# Altium PCB PMSM_G474V1.0.PcbDoc (part 2 of 2)
Units mil, origin at the board's own origin, x right, y up, seen from the top; angles counter-clockwise.
Board outline 1968.5 x 3149.61 mil, 4 copper layers (Top Layer, VCC, GND, Bottom Layer), stack 23.756 mil thick; 166 components, 95 nets, 523 pads, 254 vias.
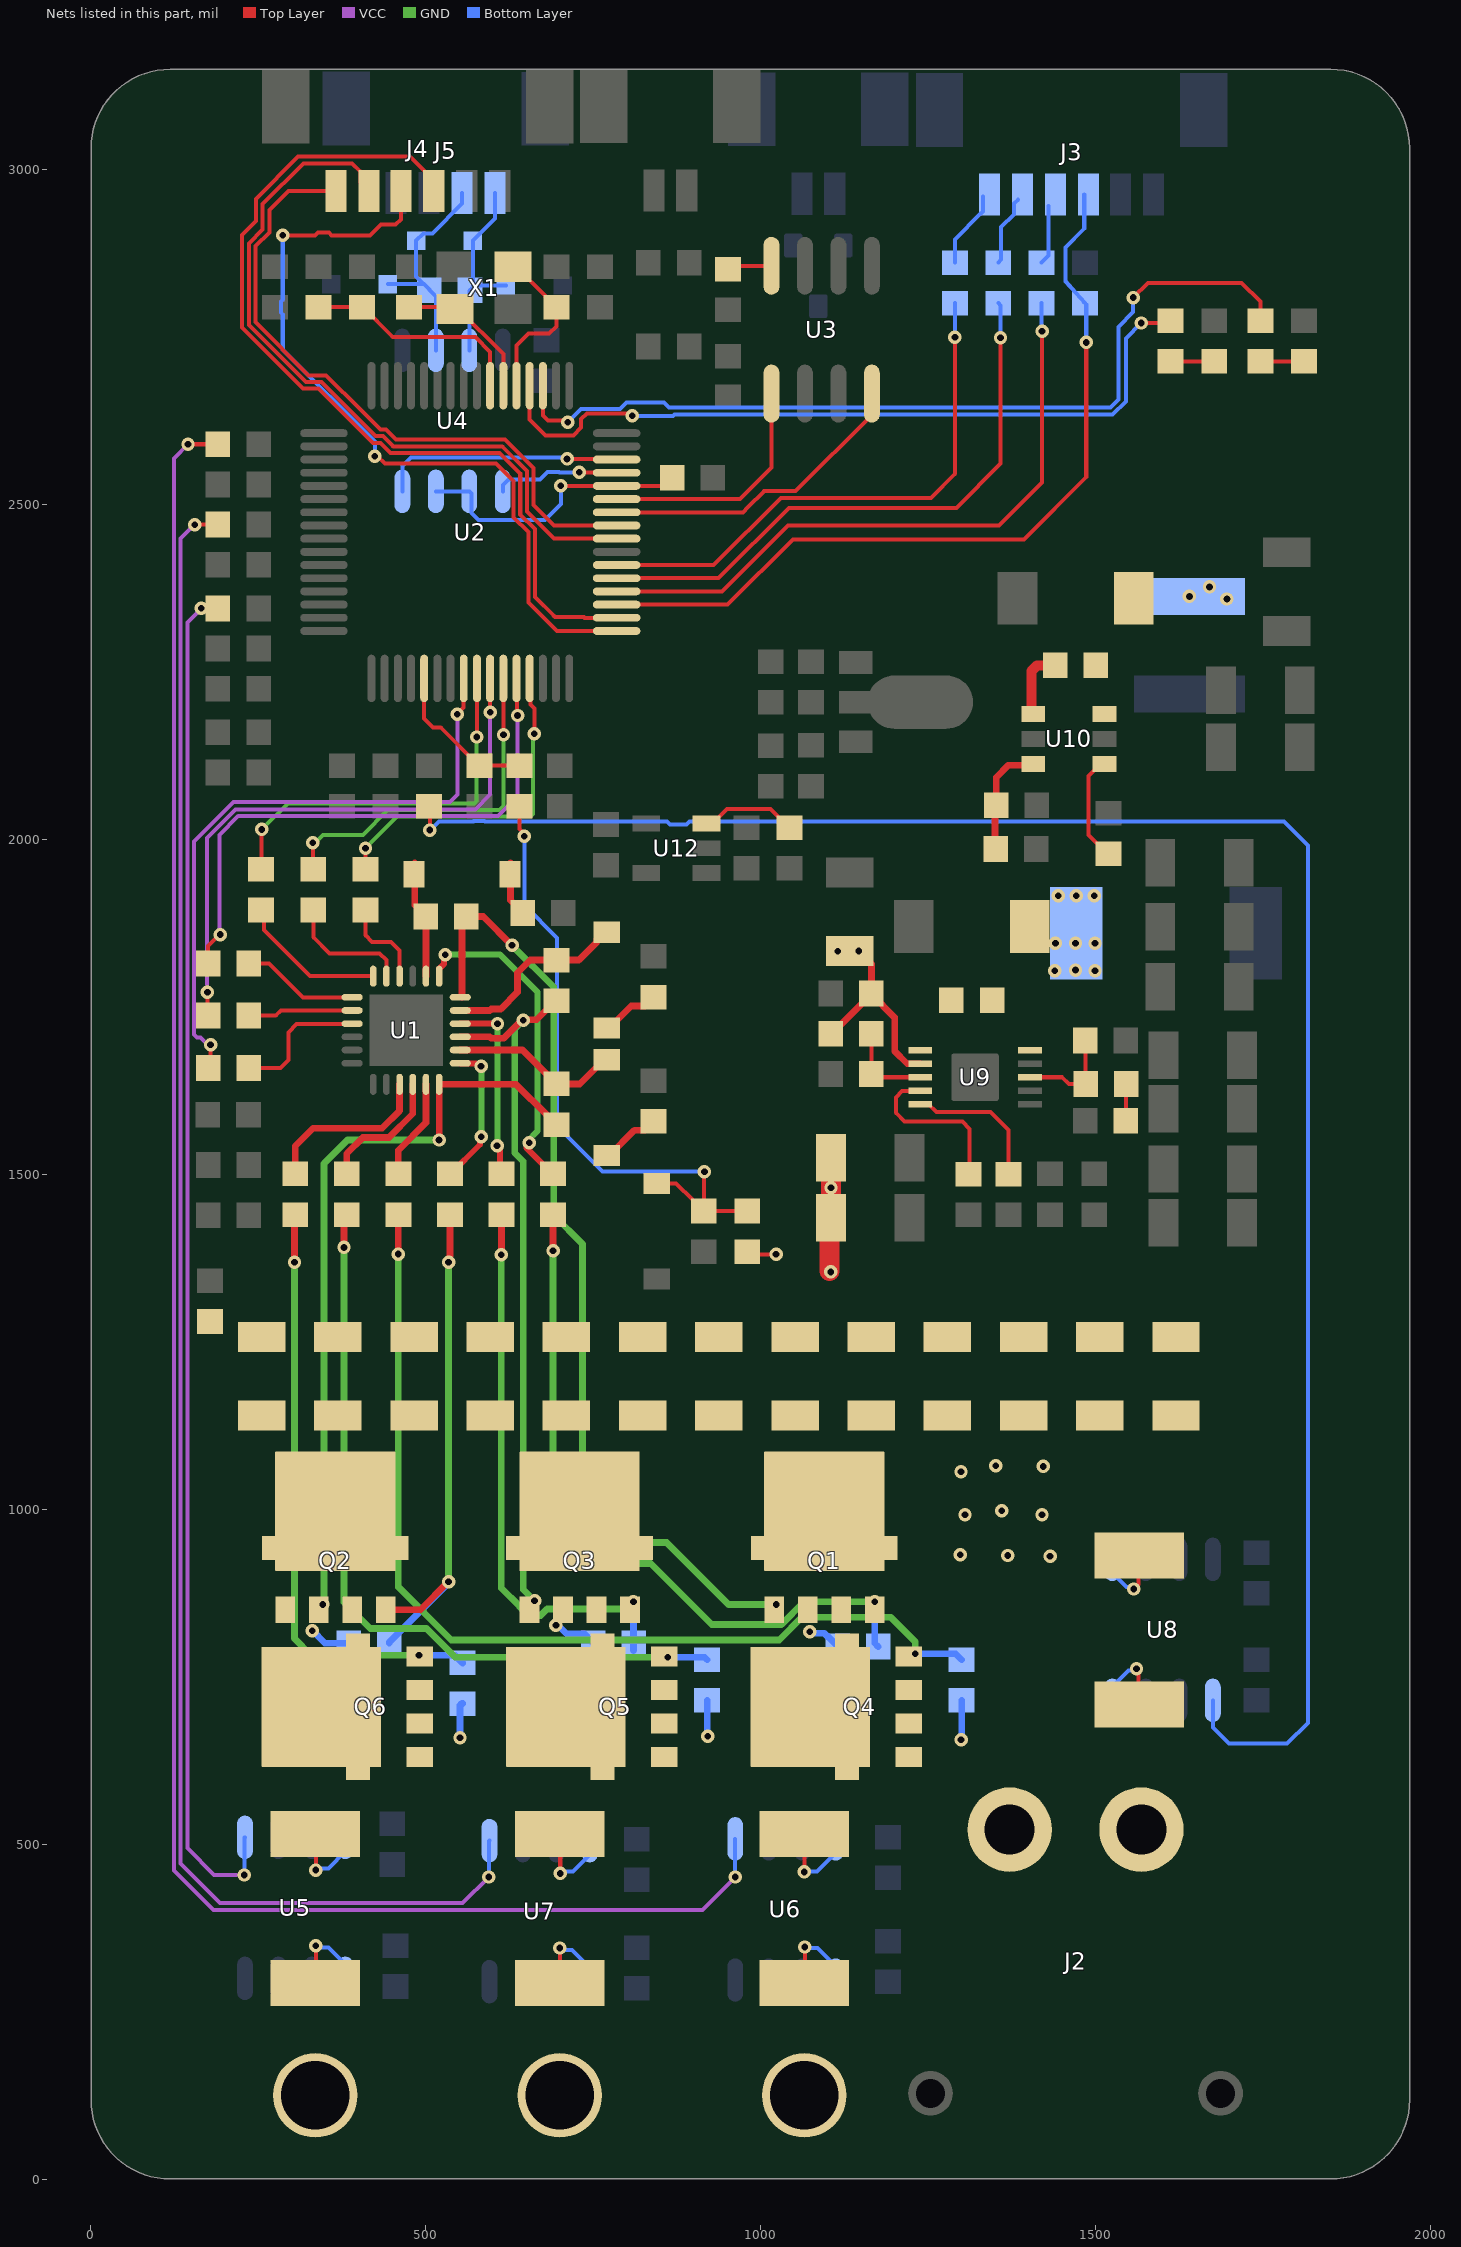
[diagram p4: the nets of this part, all layers, seen from the top]

## Via types
v1: diameter 20, hole 10, Top Layer to Bottom Layer, 237 vias
v2: diameter 40, hole 20, Top Layer to Bottom Layer, 17 vias

## Nets (pads, with @x,y where several pads share a name; then routed paths per layer and width w, separated by ;. In a path a pad name is that pad's centre, name@x,y a point inside that pad or via, vN(x,y) a via of type N, cw(c..) or ccw(c..) an arc to the next point about the centre after c; other vN are vias at no path point) (continued)
LED_0: D1.2 U2.3 | length 1328.4
  Top Layer w6: U2.3@674.76,2677.4 674.76,2633.24 682.32,2625.68 709.32,2625.68 v1(712,2623) ; v1(1556,2809) 1578,2831 1718,2831 1746,2803 D1.2@1746,2774.31
  Bottom Layer w6: v1(712,2623) 731.49,2642.49 789.73,2642.49 799.73,2652.49 855.76,2652.49 863.25,2645 1521.86,2645 1534,2657.14 1534,2765.28 1556,2787.28 v1(1556,2809)
LED_1: D3.2 U2.4 | length 1153.7
  Top Layer w6: U2.4@655.08,2677.4 655.08,2626.92 679,2603 720.28,2603 732,2614.72 732,2627.5 740.5,2636 804.51,2636 v1(808.02,2632.49) ; v1(1568,2771) 1608.69,2771 D3.2@1612,2774.31
  Bottom Layer w6: v1(808.02,2632.49) 868.98,2632.49 870.99,2634.5 1525.5,2634.5 1545,2654 1545,2748 v1(1568,2771)
MCU_CAN_N: U2.58 U3.4 | length 472.8
  Top Layer w6: U2.58@785,2488.43 973.43,2488.43 981.11,2496.11 1004.55,2519.55 1005.05,2520.05 1052.02,2520.05 1166,2634.03 U3.4@1166,2665.53
MCU_CAN_P: U2.59 U3.1 | length 361
  Top Layer w6: U2.59@785,2508.11 969.11,2508.11 992.55,2531.55 1016,2555 U3.1@1016,2665.53
MU_OUT: C11.2 Q1.1 Q4.5 R9.2 R25.1 U1.18 U6.8 | length 1620.7
  Top Layer w6: R25.1@1065,515 1065.16,514.84 v1(1065.16,458.59)
  Top Layer w10: U1.18@553.92,1764.37 554,1764.45 554,1878.68 C11.2@560.32,1885 585.74,1885 v1(628.79,1841.94)
  GND w10: v1(628.79,1841.94) 691,1779.74 691,1439 734,1396 734,1016 799.5,950.5 859.5,950.5 952,858 v1(1023,858)
  Bottom Layer w6: v1(1065.16,458.59) 1066.02,459.45 1084.16,459.45 1111.93,487.22 U6.8@1111.93,507.89
  Bottom Layer w10: v1(1073,817) 1074.91,815.09 1094.6,815.09 1100.39,809.29 1101.38,809.29 1114.68,795.98 R9.2@1114.68,795
MV_OUT: C12.2 Q3.1 Q5.5 R10.2 R24.1 U1.15 U7.8 | length 1254.5
  Top Layer w6: R24.1@700,515 700.73,514.27 v1(700.73,456.41)
  Top Layer w10: U1.15@551.42,1705.31 595.57,1705.31 597.89,1703 616.11,1703 643.11,1730 v1(645.5,1730) ; v1@646.25,1729.25 648,1731 665.65,1731 694.02,1759.37 C12.2@695,1759.37
  GND w10: v1(645.5,1730) 632.64,1717.14 632.64,1557.64 632.64,1553.74 632.64,1532.25 645.5,1519.39 645.5,880.27 v1(662.4,863.37)
  Bottom Layer w6: v1(700.73,456.41) 703.41,459.09 719.44,459.09 745,484.65 U7.8@745,505.32
  Bottom Layer w10: v1(694.24,827) 696.95,827 709.66,814.29 736.38,814.29 749.68,800.98 R10.2@749.68,800
MW_OUT: C13.2 Q2.1 Q6.5 R11.2 R23.1 U1.12 U5.8 | length 1321.4
  Top Layer w6: R23.1@335,515 335.73,514.27 v1(335.73,461.41)
  Top Layer w10: v1(519.82,1551.24) 519.92,1551.35 U1.12@519.92,1634.45 634.92,1634.45 680.71,1588.66 680.71,1587.68 694.02,1574.37 C13.2@695,1574.37
  GND w10: v1(346,858) 348,860 348,1516 383.24,1551.24 v1(519.82,1551.24)
  Bottom Layer w6: v1(335.73,461.41) 338.41,464.09 354.44,464.09 380,489.65 U5.8@380,510.32
  Bottom Layer w10: v1(330.64,818.83) 349.48,800 R11.2@384.68,800
NetC11_1: C11.1 D8.2 U1.20 | length 176.1
  Top Layer w10: D8.2@483.5,1965 483.5,1902.17 500.24,1885.43 U1.20@500.24,1795.87
NetC12_1: C12.1 D9.2 U1.17 | length 286.3
  Top Layer w10: U1.17@551.42,1744.69 595.57,1744.69 597.89,1747 612,1747 637,1772 637,1801 656,1820 C12.1@695,1820 728.5,1820 755.32,1846.81 755.32,1850.75 766.07,1861.5 D9.2@770,1861.5
NetC13_1: C13.1 D10.2 U1.14 | length 255.1
  Top Layer w10: U1.14@551.42,1685.63 644.37,1685.63 680.71,1649.29 680.71,1648.31 694.02,1635 C13.1@695,1635 729.88,1635 766.07,1671.19 D10.2@770,1671.19
NetC27_1: C27.1 U9.1
NetC27_2: C27.2 D11.2 L1.1 U9.10
  other v1: 1439,1804 1499,1804 1470,1805 1440,1845 1470,1845 1499,1845 1444,1916 1471,1916 1498,1916
NetC28_1: C28.1 U9.4 | length 251.5
  Top Layer w6: U9.4@1238,1624.84 1237.44,1624.28 1211.28,1624.28 1202,1615 1202,1592 1215,1579 1301,1579 1312,1568 1312,1502.32 C28.1@1310,1500.32
NetC37_1: C37.1 R43.2 U9.8 | length 152.3
  Top Layer w6: U9.8@1402,1645 1450,1645 1460,1635 R43.2@1485,1635 1484.69,1635.31 C37.1@1484.69,1700
NetC38_1: C38.1 R43.1 | length 55.1
  Top Layer w6: C38.1@1545.32,1580 1545.32,1634.69 R43.1@1545.63,1635
NetC39_1: C39.1 U10.1 | length 104.3
  Top Layer w15: U10.1@1406.85,2187.4 1404,2190.25 1404,2251.21 1412.79,2260 C39.1@1439.69,2260
NetC39_2: C39.2 D12.2 L2.1 U10.6
  other v1: 1696,2359 1640,2362.84 1670,2377
NetC50_1: C50.1 R48.2 U2.7 | length 334.3
  Top Layer w6: C50.1@339.96,2794.69 R48.2@405,2794.68 405.98,2794.68 450.67,2750 574,2750 596.02,2727.98 U2.7@596.02,2677.4
NetD1_1: D1.1 R26.1 | length 65
  Top Layer w6: D1.1@1746,2713.68 R26.1@1811,2713.68
NetD2_2: D2.2 R15.1 R16.2 R21.1 | length 960.7
  Top Layer w6: R21.1@640,2049.69 640,2015.79 647,2008.79 v1(647,2005) ; D2.2@845,1486.5 873.69,1486.5 898.71,1461.48 898.71,1460.62 914.02,1445.32 R16.2@915,1445.32 ; v1(916,1504) 915,1503 R16.2@915,1445.32 ; R15.1@980,1445.31 R16.2@915,1445.32
  Bottom Layer w6: v1(647,2005) 647,1902 696,1853 696,1572 764,1504 v1(916,1504)
NetD3_1: D3.1 R28.1 | length 65
  Top Layer w6: D3.1@1612,2713.68 R28.1@1677,2713.68
NetD8_1: D8.1 R36.1 | length 82.5
  Top Layer w10: D8.1@626.5,1965 626.5,1909.17 644.69,1890.98 R36.1@644.69,1890
NetD9_1: D9.1 R37.1 | length 89.1
  Top Layer w10: D9.1@770,1718.5 773.93,1718.5 806.81,1751.38 826.69,1751.38 R37.1@840,1764.69
NetD10_1: D10.1 R38.1 | length 91.2
  Top Layer w10: D10.1@770,1528.19 773.93,1528.19 811.81,1566.06 826.69,1566.06 R38.1@840,1579.37
NetJ3_1: J3.1 R58.1 | length 116
  Bottom Layer w6: R58.1@1290,2861.31 1290,2896 1328.47,2934.47 1328.9,2934.47 1332.09,2937.66 J3.1@1332.09,2959.66
NetJ3_2: J3.2 R57.1 | length 105.9
  Bottom Layer w6: R57.1@1354.67,2861.31 1359,2865.65 1359,2914 1378.11,2933.11 1378.11,2949.13 J3.2@1384,2955.02
NetJ3_3: J3.3 R56.1 | length 88.7
  Bottom Layer w6: R56.1@1419.33,2861.31 1430,2871.98 J3.3@1430,2945.57
NetR1_1: R1.1 U1.1 | length 175.3
  Top Layer w6: R1.1@235.63,1815 266,1815 316.63,1764.37 U1.1@390,1764.37
NetR2_1: R2.1 U1.2 | length 157.6
  Top Layer w6: R2.1@235.63,1737 276,1737 283.69,1744.69 U1.2@390,1744.69
NetR3_1: R3.1 U1.3 | length 205.7
  Top Layer w6: R3.1@235.63,1659 283,1659 295,1671 295,1712 307.26,1724.26 389.26,1724.26 U1.3@390,1725
NetR4_1: R4.1 U1.22 | length 136.3
  Top Layer w6: R4.1@410,1894.69 410,1857 420,1847 448,1847 460.87,1834.13 U1.22@460.87,1795.87
NetR6_1: R6.1 U1.23 | length 188
  Top Layer w6: R6.1@332,1894.69 332,1854 356,1830 431,1830 441.18,1819.82 U1.23@441.18,1795.87
NetR7_1: R7.1 U1.13 | length 214
  Top Layer w9: R7.1@536,1500.63 536.98,1500.63 580.9,1544.54 580.9,1553.9 v1(583,1556) ; U1.13@551.42,1665.94 551.58,1665.78 575.22,1665.78 579.59,1661.41 v1(582.56,1661.41)
  GND w9: v1(582.56,1661.41) 583,1660.97 v1(583,1556)
NetR8_1: R8.1 U1.24 | length 223.5
  Top Layer w6: R8.1@254,1894.69 258.11,1890.58 258.11,1864.89 327.13,1795.87 U1.24@421.5,1795.87
NetR18_2: R18.2 U5.5 | length 2042.7
  Top Layer w6: v1(165,2345) R18.2@189.68,2345
  VCC w6: v1(165,2345) 144,2324 144,494 184,454 v1(229,454)
  Bottom Layer w6: v1(229,454) 229.5,454.5 229.5,509.82 U5.5@230,510.32
NetR19_2: R19.2 U6.5 | length 3122
  Top Layer w6: v1(145,2590) R19.2@189.68,2590
  VCC w6: v1(145,2590) 124,2569 124,461 183,402 913,402 v1(962,451)
  Bottom Layer w6: v1(962,451) U6.5@961.97,507.86
NetR20_2: R20.2 U7.5 | length 2597.7
  Top Layer w6: v1(155,2470) R20.2@189.68,2470
  VCC w6: v1(155,2470) 134,2449 134,471 193,412 555,412 v1(594,451)
  Bottom Layer w6: v1(594,451) 594.5,451.5 594.5,504.82 U7.5@595,505.32
NetR22_2: R22.2 U8.5 | length 2886.5
  Top Layer w6: R22.2@505,2049.37 506,2048.37 v1(506,2014)
  Bottom Layer w6: v1(506,2014) 506.87,2014 519.87,2027 571.12,2027 571.45,2027.33 588.02,2027.33 588.34,2027 859.91,2027 864.41,2022.5 889.26,2022.5 893.76,2027 1781,2027 1817,1991 1817,681 1786.02,650.02 1698.98,650.02 1675,674 U8.5@1675,714.69
NetR27_1: R27.1 U1.19 | length 496.9
  Top Layer w9: U1.19@519.92,1795.87 519.92,1806.92 526.9,1813.89 526.9,1825.9 v1(529,1828) ; v1(654.64,1547) 653.53,1545.9 650.1,1545.9 650.1,1539.54 689.02,1500.63 R27.1@690,1500.63
  GND w9: v1(529,1828) 611,1828 667,1772 667,1565 651.82,1549.82 v1(654.64,1547)
NetR29_1: R29.1 U1.16 | length 282.9
  Top Layer w9: U1.16@551.42,1725 v1(607,1725) ; v1(606.43,1542.57) 606.43,1539.6 610.64,1535.39 610.64,1502.99 R29.1@613,1500.63
  GND w9: v1(606.43,1542.57) 606.71,1542.86 606.71,1724.71 v1(607,1725)
NetR31_1: R31.1 U1.11 | length 150.9
  Top Layer w10: R31.1@459,1500.63 459,1536 500.24,1577.24 U1.11@500.24,1634.45
NetR33_1: R33.1 U1.10 | length 197.5
  Top Layer w10: R33.1@382,1500.63 382,1531 406,1555 445,1555 480.55,1590.55 U1.10@480.55,1634.45
NetR35_1: R35.1 U1.9 | length 258.7
  Top Layer w10: R35.1@305,1500.63 305,1542 332,1569 435,1569 460.87,1594.87 U1.9@460.87,1634.45
NetR40_1: R40.1 R42.2 U9.3 | length 134.8
  Top Layer w6: R40.1@1165.32,1710 R42.2@1165.32,1650 1170.32,1645 U9.3@1238,1645
NetR44_2: R44.2 U9.5 | length 213.7
  Top Layer w6: U9.5@1238,1604.69 1250.8,1604.69 1262.49,1593 1343,1593 1370,1566 R44.2@1370,1500.32
NetR45_1: R45.1 U10.4 | length 159.8
  Top Layer w6: U10.4@1513.15,2112.6 1507.24,2112.6 1489.71,2095.06 1489.71,2006.99 1518.02,1978.69 R45.1@1519,1978.69
NetR46_1: R46.1 R47.1 U10.3 | length 170.9
  Top Layer w10: R47.1@1349.69,1986 1349.69,2049 R46.1@1351.69,2051 1351.69,2092.69 1370,2111 1405.25,2111 U10.3@1406.85,2112.6
NetR50_2: R50.2 U12.3 | length 145.7
  Top Layer w6: U12.3@919,2024 927.86,2024 949.48,2045.62 1014.71,2045.62 R50.2@1043.02,2017.32 R50.2@1044,2017.32
NetR51_1: R51.1 U3.8 | length 67.1
  Top Layer w6: R51.1@951,2851.31 956.16,2856.47 U3.8@1016,2856.47
OSC_IN: C51.2 U2.5 X1.1 | length 250.8
  Top Layer w6: X1.1@630,2855 634.92,2855 678.71,2811.21 678.71,2809.99 694.02,2794.69 C51.2@695,2794.69 695,2766 684,2755 653,2755 635.39,2737.39 U2.5@635.39,2677.4
OSC_OUT: C52.2 U2.6 X1.3 | length 216.9
  Top Layer w6: C52.2@475,2794.69 540.69,2794.69 X1.3@543.38,2792 548.3,2792 615.71,2724.59 U2.6@615.71,2677.4
PGND: C14.2 C15.2 C16.2 C17.2 C18.2 C19.2 C20.2 C21.2 C22.2 C23.2 C24.2 C25.2 C26.2 J2.2 Q4.1 Q5.1 Q6.1 R5.2 R12.2 R13.2 R14.2 | length 167
  Bottom Layer w10: v1(551,659) 551,706 cw(c555,706) R14.2@555,710 ; R13.2@920,714.68 920,662 ccw(c921,662) v1(921,661) ; v1(1299.11,655.77) ccw(c1299.11,656.66) 1300,656.66 R12.2@1300,714.68
RS485_A: D20.1 D21.2 J5.3 R53.2 U4.6 | length 336
  Bottom Layer w6: D21.2@443.32,2829 R53.2@496.37,2829 ; U4.6@515,2730.32 515,2810.37 R53.2@505.37,2820 505.37,2820.98 485.68,2840.68 D20.1@485.68,2894 496.46,2904.78 509.74,2904.78 554.21,2949.25 J5.3@554.21,2965
RS485_B: D20.2 D22.2 J5.4 R53.1 U4.7 | length 304.1
  Bottom Layer w6: U4.7@565,2730.32 565,2819 R53.1@566,2820 R53.1@568.16,2822.16 ; J5.4@603.42,2965 603.42,2927.1 D20.2@570.32,2894 570.32,2824.32 R53.1@568.16,2822.16 ; D22.2@619.68,2827 573,2827 R53.1@568.16,2822.16
RS485_EN: R49.2 U2.60 U4.2 U4.3 | length 435.1
  Top Layer w6: v1(701.67,2527.96) 701.75,2527.88 784.92,2527.88 U2.60@785,2527.8 852.38,2527.8 852.69,2528.11 852.69,2532.04 863.69,2543.75 R49.2@867.68,2548
  Bottom Layer w6: U4.3@515,2519.69 U4.2@565,2519.69 568.37,2516.31 568.37,2487.63 578.79,2477.21 678.21,2477.21 701.67,2500.67 v1(701.67,2527.96)
RS485_RX: U2.61 U4.1 | length 188.1
  Top Layer w6: v1(729,2548) 729.26,2547.74 784.74,2547.74 U2.61@785,2547.48
  Bottom Layer w6: U4.1@615,2519.69 615,2529.22 623.14,2537.36 670.36,2537.36 681.74,2548.74 698.74,2548.74 699.48,2548 v1(729,2548)
RS485_TX: U2.62 U4.4 | length 363.9
  Top Layer w6: v1(710.93,2568.07) 711,2568 784.17,2568 U2.62@785,2567.17
  Bottom Layer w6: U4.4@465,2519.69 465.39,2520.08 465.39,2557.39 478,2570 709,2570 v1(710.93,2568.07)
SPI_CS: J3.4 R55.1 U2.51 | length 1226.4
  Top Layer w6: U2.51@785,2350.63 950.63,2350.63 1048,2448 1393,2448 1486,2541 v1(1486,2742)
  Bottom Layer w6: R55.1@1483.02,2801.67 1486,2798.69 v1(1486,2742) ; J3.4@1483.02,2962.5 1483.02,2912.07 1454.71,2883.77 1454.71,2833.87 1470.49,2815.99 R55.1@1484,2800.69
SPI_MISO: R57.2 U2.53 | length 884.9
  Top Layer w6: U2.53@785,2390 937,2390 1042,2495 1292,2495 1358,2561 v1(1358,2749)
  Bottom Layer w6: R57.2@1354.67,2800.68 1358,2797.35 v1(1358,2749)
SPI_MOSI: R58.2 U2.54 | length 816.1
  Top Layer w6: U2.54@785,2409.69 929.69,2409.69 1030.06,2510.05 1254.06,2510.05 1289.96,2545.96 v1(1289.96,2749.62)
  Bottom Layer w6: v1(1289.96,2749.62) 1290,2749.66 R58.2@1290,2800.68
SPI_SCK: R56.2 U2.52 | length 970.4
  Top Layer w6: U2.52@785,2370.32 942.32,2370.32 1041,2469 1356,2469 1420.05,2533.05 v1(1420.05,2758.63)
  Bottom Layer w6: R56.2@1419.33,2800.68 1419.33,2759.35 v1(1420.05,2758.63)
SWCLK: J4.3 U2.50 | length 1356.8
  Top Layer w6: J4.3@511.93,2967.97 511.93,2983.71 476.18,3019.46 309.46,3019.46 246.44,2956.44 246.44,2923.44 225.71,2902.71 225.71,2763.95 316.66,2673 339.86,2673 420.86,2592 432.28,2592 447.28,2577 610,2577 641,2546 641,2485.14 663,2463.14 663,2362 691.02,2333.98 693,2332 736,2332 737.06,2330.94 U2.50@785,2330.94
SWDIO: J4.4 U2.49 | length 1183.1
  Top Layer w6: v1(286.44,2901.86) 334.58,2901.86 338.72,2906 355.28,2906 359.42,2901.86 416.86,2901.86 433,2918 455,2918 462.72,2925.72 J4.4@462.72,2967.97 ; v1(424,2572) 427.79,2572 438.79,2561 605,2561 631,2535 631,2481 653,2459 653,2354 695.74,2311.26 U2.49@785,2311.26
  Bottom Layer w6: v1(286.44,2901.86) 286.44,2805.74 283.67,2802.97 283.67,2786.4 286.44,2783.63 286.44,2731.56 424,2594 v1(424,2572)
U_OUT: J1.1 R25.2 U6.1 | length 132.8
  Top Layer w6: R25.2@1065,292.56 1065.9,293.46 v1(1065.9,346.47)
  Bottom Layer w6: v1(1065.9,346.47) 1067.41,344.96 1084.9,344.96 1111.93,317.93 U6.1@1111.93,297.26
UART2_RX: J4.6 U2.57 | length 984.3
  Top Layer w6: J4.6@365.72,2967.97 294.97,2967.97 266.44,2939.44 266.44,2906.44 245.71,2885.71 245.71,2772.24 324.95,2693 351.24,2693 402.95,2641.29 432.24,2612 440.57,2612 455.57,2597 618.28,2597 661,2554.28 661,2499 691.26,2468.74 U2.57@785,2468.74
UART2_TX: J4.5 U2.56 | length 1116.4
  Top Layer w6: J4.5@414.93,2967.97 402.18,2980.71 402.18,2996.82 389.54,3009.46 317.46,3009.46 256.44,2948.44 256.44,2910.58 235.71,2889.85 235.71,2768.09 320.8,2683 344,2683 425,2602 436.43,2602 451.43,2587 605,2587 614.14,2587 651,2550.14 651,2504.28 651,2489.28 691.23,2449.06 U2.56@785,2449.06
UH_IN: R4.2 U2.45 | length 508.9
  Top Layer w6: R4.2@410,1955.32 v1(410,1987) ; U2.45@655.08,2240.39 656.19,2239.28 656.19,2201.43 662,2195.62 v1(662,2158)
  GND w6: v1(410,1987) 457,2034 656,2034 660,2038 660,2156 v1(662,2158)
UH_OUT: Q1.4 R9.1 R27.2 | length 1097.5
  Top Layer w10: v1(690,1386) R27.2@690,1440
  GND w10: v1(690,1386) 690,961 732,919 835.86,919 926.9,827.96 1030.76,827.96 1064.8,862 v1(1170.22,862)
  Bottom Layer w10: v1(1170.22,862) 1170.22,800.09 R9.1@1175.31,795
UL_IN: R1.2 U2.44 | length 846.6
  Top Layer w6: R1.2@175,1815 175,1841 192,1858 v1(193.36,1858) ; U2.44@635.39,2240.39 636.2,2239.59 636.2,2185.8 v1(637,2185)
  VCC w6: v1(193.36,1858) 192,1859.36 192,2007 220,2035 608,2035 637,2064 v1(637,2185)
UL_OUT: Q4.4 R12.1 R31.2 | length 1480.7
  Top Layer w10: v1(459,1381) R31.2@459,1440
  GND w10: v1(459,1381) 459,884 538,805 1027.6,805 1061.6,839 1194,839 1230.9,802.1 v1(1230.9,784.12)
  Bottom Layer w10: v1(1230.9,784.12) 1291.19,784.12 R12.1@1300,775.31
V_OUT: J8.1 R24.2 U7.1 | length 130.4
  Top Layer w6: R24.2@700,292.56 v1(700,345)
  Bottom Layer w6: v1(700,345) 702.68,342.32 718.03,342.32 745,315.35 U7.1@745,294.69
VBAT: J2.1 R17.1 U8.8 | length 122.6
  Top Layer w6: v1(1561,762) 1564.09,758.91 1564.09,709.69 R17.1@1565,708.78
  Bottom Layer w6: U8.8@1525,714.69 1525,735.36 1548.97,759.32 1558.32,759.32 v1(1561,762)
VH_IN: R6.2 U2.43 | length 538.6
  Top Layer w6: v1(331.28,1995.06) 331.28,1956.04 R6.2@332,1955.32 ; U2.43@615.71,2240.39 615.71,2198.91 616.34,2198.28 616.34,2180.93 615.71,2180.3 615.71,2156.78 v1(616,2156.49)
  GND w6: v1(331.28,1995.06) 334.27,1995.06 346.21,2007 406,2007 443,2044 610,2044 616,2050 v1(616,2156.49)
VH_OUT: Q3.4 R10.1 R29.2 | length 853.5
  Top Layer w10: v1(612.7,1380.2) 613,1380.5 R29.2@613,1440
  GND w10: v1(612.7,1380.2) 612.7,882.3 640.4,854.6 640.4,854.26 653.28,841.37 671.51,841.37 681.14,851 799,851 v1(810,862)
  Bottom Layer w10: R10.1@810,789.31 v1(810,862)
VIN: C14.1 C15.1 C16.1 C17.1 C18.1 C19.1 C20.1 C21.1 C22.1 C23.1 C24.1 C25.1 C26.1 C29.1 C30.1 C31.1 C32.1 Q1.5 Q2.5 Q3.5 R15.2 R17.2 R40.2 U8.1 U9.2 | length 638.1
  Top Layer w6: R15.2@984.04,1380.64 v1(1022.95,1380.64) ; v1(1557,881) 1557,881.23 1563.78,888.01 1563.78,930 R17.2@1565,931.22
  Top Layer w10: R40.2@1104.69,1710 1104.69,1710.98 1117.99,1724.29 1120.59,1724.29 C29.1@1165.32,1769.02 ; C32.1@1133,1833.34 v1(1146.19,1833.34) 1165.32,1814.21 C29.1@1165.32,1770 C29.1@1165.32,1769.02 ; U9.2@1238,1665.15 1237.92,1665.23 1218.76,1665.23 1200,1683.98 1200,1734.33 C29.1@1165.32,1769.02
  Top Layer w30: v1@1102.91,1355.96 C30.1@1102.91,1432.91 ; C30.1@1105,1435 v1(1105,1480) C31.1@1105,1525
  Bottom Layer w6: U8.1@1525,925.32 1525,904.65 1545.97,883.68 1554.32,883.68 v1(1557,881)
  other v1: 1432,930 1369,931 1298,932 1305,992 1420,992 1360,998 1299,1056 1422,1064 1351,1065 1104.48,1354.39 1115,1833
VL_IN: R2.2 U2.42 | length 889.2
  Top Layer w6: v1(174,1771.9) 174,1738 R2.2@175,1737 ; U2.42@596.02,2240.39 596.18,2240.24 596.18,2190.16 v1(596.34,2190)
  VCC w6: v1(174,1771.9) 173.36,1772.54 173.36,2002.51 215.86,2045 574,2045 596,2067 596,2189.66 v1(596.34,2190)
VL_OUT: Q5.4 R13.1 R33.2 | length 1163.7
  Top Layer w10: v1(377.83,1390.94) 377.83,1435.83 R33.2@382,1440 ; Q5.4@856.09,780.2 859.8,780.2 v1(861,779)
  GND w10: v1(377.83,1390.94) 377.83,861.17 417,822 501.2,822 544.2,779 v1(861,779)
  Bottom Layer w10: v1(861,779) 916.31,779 R13.1@920,775.31
VOL_SAMP: C8.1 R21.2 U2.37 | length 231.4
  Top Layer w6: U2.37@497.6,2240.39 497.6,2180.4 511,2167 522.33,2167 579.02,2110.32 C8.1@580,2110.32 R21.2@640,2110.32
W_OUT: J9.1 R23.2 U5.1 | length 133
  Top Layer w6: R23.2@335,292.56 335.73,293.29 v1(335.73,348.59)
  Bottom Layer w6: v1(335.73,348.59) 338.41,345.91 354.44,345.91 380,320.35 U5.1@380,299.69
WH_IN: R8.2 U2.41 | length 581.7
  Top Layer w6: R8.2@254,1955.32 255,1956.32 v1(255,2015) ; v1(576,2153) 576.34,2153.34 U2.41@576.34,2240.39
  GND w6: v1(255,2015) 294,2054 572.49,2054 576,2057.51 v1(576,2153)
WH_OUT: Q2.4 R7.2 R11.1 | length 780
  Top Layer w10: Q2.4@440.2,849.96 491.96,849.96 v1(534,892) ; v1@535,1377 536,1378 R7.2@536,1440
  GND w10: v1(534,892) v1(534,1368.62)
  Bottom Layer w10: R11.1@445.31,800 445.31,800.98 534,889.67 v1(534,892)
WL_IN: R3.2 U2.40 | length 954.6
  Top Layer w6: R3.2@175,1659 178.69,1662.69 v1(178.69,1693.37) ; v1(547,2187) 547,2187.49 556.5,2196.98 556.5,2240.24 U2.40@556.65,2240.39
  VCC w6: v1(178.69,1693.37) 174.9,1693.37 163.87,1704.4 158.6,1704.4 154,1709 154,1997.28 212.72,2056 536,2056 547,2067 v1(547,2187)
WL_OUT: Q6.4 R14.1 R35.2 | length 899.5
  Top Layer w10: v1(304,1369) 304,1439 R35.2@305,1440
  GND w10: v1(304,1369) 304,807 329,782 v1(490,782)
  Bottom Layer w10: v1(490,782) 543.63,782 R14.1@555,770.63
pads on no net: J2.0 J3.0 J4.0 J5.0 J6.0 J7.0 U1.5 U1.7 U1.8 U1.21 U2.2 U2.8 U2.9 U2.10 U2.11 U2.12 U2.13 U2.14 U2.17 U2.18 U2.19 U2.20 U2.21 U2.22 U2.23 U2.30 U2.33 U2.34 U2.35 U2.38 U2.39 U2.46 U2.55 U3.5 U5.4 U6.4 U7.4 U8.4 U9.6 U12.4

## Polygon pours and split planes (outlines as drawn)
PGND on Top Layer "PGND_L01_P013" (solid, remove dead copper, pour order 13): 118.11,236.22 cw(c118.11,118.11) 236.22,118.11 ccw(c275.59,118.11) 275.59,78.74 1692.91,78.74 ccw(c1692.92,118.11) 1732.28,118.11 cw(c1850.39,118.11) 1850.39,236.22 ccw(c1850.39,275.59) 1889.76,275.59 1889.76,1220.47 ccw(c1811.02,1220.47) 1811.02,1299.21 157.48,1299.21 ccw(c157.48,1220.47) 78.74,1220.47 78.74,275.59 ccw(c118.11,275.59)
5V on Top Layer "5V_L01_P023" (solid, pour order 23): 1751,2334 1747,2330 1747,2287 1719,2259 1564,2259 1551,2246 1551,2184 1653,2184 1666,2171 1666,2107 1700,2107 1729,2136 1729,2215 1797,2283 1820,2283 1820,2325 1811,2334
NetC39_2 on Top Layer "NETC39_2_L01_P022" (solid, pour order 22): 1491,2281 1485,2281 1482,2278 1482,2190 1497,2175 1532,2175 1532,2306 1547,2321 1717,2321 1727,2331 1727,2389 1716,2400 1502,2400 1491,2389
NetC27_1 on Top Layer "NETC27_1_L01_P016" (solid, pour order 16): 1304,1777 1302,1779 1222,1779 1215,1772 1215,1686 1220,1681 1222,1683 1255,1683 1255,1733 1263,1741 1304,1741
15V on Top Layer "15V_L01_P015" (solid, pour order 15): 1501,2162 1495,2156 1495,2145 1501,2139 1539,2139 1545,2133 1545,2064 1538,2057 1505,2057 1500,2052 1500,2028 1507,2021 1680,2021 1692,2009 1692,1717 1696,1713 1696,1402 1736,1402 1741,1407 1741,1759 1752,1770 1773,1770 1782,1779 1782,2054 1749,2087 1609,2087 1583,2113 1583,2143 1564,2162 1556,2162
NetC27_2 on Top Layer "NETC27_2_L01_P014" (solid, pour order 14): 1368,1932 1358,1922 1358,1790 1349,1781 1329,1781 1327,1779 1327,1738 1335,1730 1381,1730 1385,1726 1385,1686 1419,1686 1420,1685 1421,1686 1421,1780 1427,1786 1511,1786 1515,1790 1515,1927 1510,1932
U_OUT on Top Layer "U_OUT_L01_P011" (solid, pour order 11): 1024,328 990,328 ccw(c990,319) 981,319 981,124 ccw(c1065,124) 1065,40 ccw(c1065,125) 1150,125 1150,317 ccw(c1140,317) 1140,327
V_OUT on Top Layer "V_OUT_L01_P010" (solid, pour order 10): 659,328 625,328 ccw(c625,319) 616,319 616,124 ccw(c700,124) 700,40 ccw(c700,125) 785,125 785,317 ccw(c775,317) 775,327
W_OUT on Top Layer "W_OUT_L01_P009" (solid, pour order 9): 294,328 260,328 ccw(c260,319) 251,319 251,124 ccw(c335,124) 335,40 ccw(c335,125) 420,125 420,317 ccw(c410,317) 410,327
VIN on Top Layer "VIN_L01_P008" (solid, pour order 8): 1236,897 cw(c1236,903) 1230,903 ccw(c1225,903) 1225,908 225,908 cw(c225,919) 214,919 214,1155 cw(c225,1155) 225,1166 1659,1166 cw(c1659,1150) 1675,1150 1675,915 cw(c1657,915) 1657,897
VBAT on Top Layer "VBAT_L01_P006" (solid, pour order 6): 1494,743 ccw(c1494,738) 1489,738 1489,461 ccw(c1505,461) 1505,445 1633,445 ccw(c1633,460) 1648,460 1648,734 ccw(c1639,734) 1639,743
MU_OUT on Top Layer "MU_OUT_L01_P003" (solid, pour order 3): 1164,616 1164,490 cw(c1155,490) 1155,481 989,481 cw(c989,489) 981,489 981,856 cw(c1000,856) 1000,875 1129,875 cw(c1129,865) 1139,865 1139,822 ccw(c1146,822) 1146,815 cw(c1146,798) 1163,798 1163,791
MV_OUT on Top Layer "MV_OUT_L01_P002" (solid, pour order 2): 798.51,616 798.51,490 cw(c789.51,490) 789.51,481 623.51,481 cw(c623.51,489) 615.51,489 615.51,856 cw(c634.51,856) 634.51,875 763.51,875 cw(c763.51,865) 773.51,865 773.51,822 ccw(c780.51,822) 780.51,815 cw(c780.51,798) 797.51,798 797.51,791
MW_OUT on Top Layer "MW_OUT_L01_P001" (solid, pour order 1): 434,616 434,490 cw(c425,490) 425,481 259,481 cw(c259,489) 251,489 251,856 cw(c270,856) 270,875 399,875 cw(c399,865) 409,865 409,822 ccw(c416,822) 416,815 cw(c416,798) 433,798 433,791
VBAT on Top Solder "VBAT_L01_P005" (solid, pour order 5): 1494,743 ccw(c1494,738) 1489,738 1489,461 ccw(c1505,461) 1505,445 1633,445 ccw(c1633,460) 1648,460 1648,734 ccw(c1639,734) 1639,743
15V on VCC "15V_L02_P018" (solid, remove dead copper, pour order 18): 1818.78,1299.21 ccw(c1818.78,1370.43) 1890,1370.43 1890,1987 ccw(c1790,1987) 1790,2087 1566,2087 ccw(c1566,2024.5) 1503.5,2024.5 cw(c1411,2024.5) 1411,1932 179,1932 ccw(c179,1832) 79,1832 79,1369.94 ccw(c149.72,1369.94) 149.72,1299.21 706,1299.21 ccw(c706,1399.21) 806,1399.21 806,1475 cw(c894,1475) 894,1563 971,1563 ccw(c971,1663) 1071,1663 1071,1828 cw(c1100,1828) 1100,1857 1350,1857 cw(c1350,1757) 1450,1757 1450,1399 ccw(c1550,1399) 1550,1299 1656,1299
3V3 on VCC "3V3_L02_P026" (solid, remove dead copper, pour order 26): 1827.8,2339 ccw(c1827.8,2401.2) 1890,2401.2 1890,2869 ccw(c1845,2869) 1845,2914 1833,2914 cw(c1833,3014) 1733,3014 1733,3034 ccw(c1696,3034) 1696,3071 281,3071 ccw(c281,3026) 236,3026 236,3016 cw(c136,3016) 136,2916 130,2916 ccw(c130,2865) 79,2865 79,2032 ccw(c179,2032) 179,1932 781,1932 ccw(c781,1993) 842,1993 842,2104.7 cw(c903.3,2104.7) 903.3,2166 1287.22,2166 ccw(c1287.22,2216.51) 1337.73,2216.51 1337.73,2239 cw(c1437.73,2239) 1437.73,2339 1747,2339
5V on VCC "5V_L02_P024" (solid, pour order 24): 1799.85,2087 ccw(c1799.85,2177.15) 1890,2177.15 1890,2270 ccw(c1821,2270) 1821,2339 1438,2339 ccw(c1438,2239) 1338,2239 1338,2222 cw(c1282,2222) 1282,2166 910,2166 ccw(c910,2098) 842,2098 842,1993 ccw(c904,1993) 904,1931 1410,1931 ccw(c1410,2024.5) 1503.5,2024.5 1503.5,2030.66 cw(c1559.84,2030.66) 1559.84,2087
VIN on VCC "VIN_L02_P019" (solid, pour order 19): 1100,1857 ccw(c1100,1828) 1071,1828 1071,1653.15 cw(c980.85,1653.15) 980.85,1563 906,1563 ccw(c906,1463) 806,1463 806,1389.36 cw(c715.85,1389.36) 715.85,1299.21 312,1299.21 ccw(c312,1199.21) 212,1199.21 212,981 ccw(c292,981) 292,901 1576,901 ccw(c1576,1001) 1676,1001 1676,1199 ccw(c1576,1199) 1576,1299 1540.15,1299 cw(c1540.15,1389.15) 1450,1389.15 1450,1757 ccw(c1350,1757) 1350,1857
AD_3V3 on Bottom Layer "AD_3V3_L04_P030" (solid, remove dead copper, pour order 30): 1741,1010 cw(c1741,949) 1802,949 1802,714 cw(c1752,714) 1752,664 1563,664 ccw(c1563,626) 1525,626 cw(c1492,626) 1492,593 1354,593 ccw(c1354,538) 1299,538 1299,346 cw(c1199,346) 1199,246 249,246 cw(c249,304) 191,304 191,514 cw(c248,514) 248,571 1125,571 ccw(c1125,607) 1161,607 cw(c1198,607) 1198,644 1310,644 ccw(c1310,670) 1336,670 1336,828 cw(c1374,828) 1374,866 1407,866 ccw(c1407,924) 1465,924 cw(c1551,924) 1551,1010 1611,1010
GND on GND "GND_L03_P027" (solid, pour order 27): 118.11,236.22 cw(c118.11,275.59) 78.74,275.59 78.99,275.84 78.99,2874.27 cw(c118.36,2874.27) 118.36,2913.64 ccw(c118.36,3031.75) 236.47,3031.75 cw(c275.84,3031.75) 275.84,3071.12 1693.16,3071.12 cw(c1693.16,3031.75) 1732.53,3031.75 ccw(c1850.64,3031.75) 1850.64,2913.64 cw(c1850.64,2874.27) 1890.01,2874.27 1890.01,275.84 1889.76,275.59 cw(c1850.39,275.59) 1850.39,236.22 ccw(c1850.39,118.11) 1732.28,118.11 cw(c1692.92,118.11) 1692.91,78.74 1693.16,78.99 275.84,78.99 275.59,78.74 cw(c275.59,118.11) 236.22,118.11 ccw(c118.11,118.11)

## Silkscreen, mask and mechanical layers (free items; w line width, h text height)
Bottom Overlay:
  drawing of 19 lines, arcs and shapes, not listed
Mechanical 5:
  circle w0.5: c1850.64,118.36 r62.99
  circle w0.5: c118.36,118.36 r62.99
  circle w0.5: c1850.64,3031.75 r62.99
  circle w0.5: c118.36,3031.75 r62.99
  lines w0.5: 0.25,118.36 ccw(c118.36,118.36) 118.36,0.25 1850.64,0.25 ccw(c1850.64,118.36) 1968.75,118.36 1968.75,3031.75 ccw(c1850.64,3031.75) 1850.64,3149.86 118.36,3149.86 ccw(c118.36,3031.75) 0.25,3031.75 0.25,118.36 ; 78.74,275.59 ccw(c118.11,275.59) 118.11,236.22 cw(c118.11,118.11) 236.22,118.11 ccw(c275.59,118.11) 275.59,78.74 1692.91,78.74 ccw(c1692.92,118.11) 1732.28,118.11 cw(c1850.39,118.11) 1850.39,236.22 ccw(c1850.39,275.59) 1889.76,275.59 1889.76,1220.47 ccw(c1811.02,1220.47) 1811.02,1299.21 157.48,1299.21 ccw(c157.48,1220.47) 78.74,1220.47 78.74,275.59 ; 78.99,275.84 ccw(c118.36,275.84) 118.36,236.47 cw(c118.36,118.36) 236.47,118.36 ccw(c275.84,118.36) 275.84,78.99 1693.16,78.99 ccw(c1693.17,118.36) 1732.53,118.36 cw(c1850.64,118.36) 1850.64,236.47 ccw(c1850.64,275.84) 1890.01,275.84 1890.01,2874.27 ccw(c1850.64,2874.27) 1850.64,2913.64 cw(c1850.64,3031.75) 1732.53,3031.75 ccw(c1693.16,3031.75) 1693.16,3071.12 275.84,3071.12 ccw(c275.84,3031.75) 236.47,3031.75 cw(c118.36,3031.75) 118.36,2913.64 ccw(c118.36,2874.27) 78.99,2874.27 78.99,275.84